# EAGLE board lasersupply8bit (EAGLE 5.11)
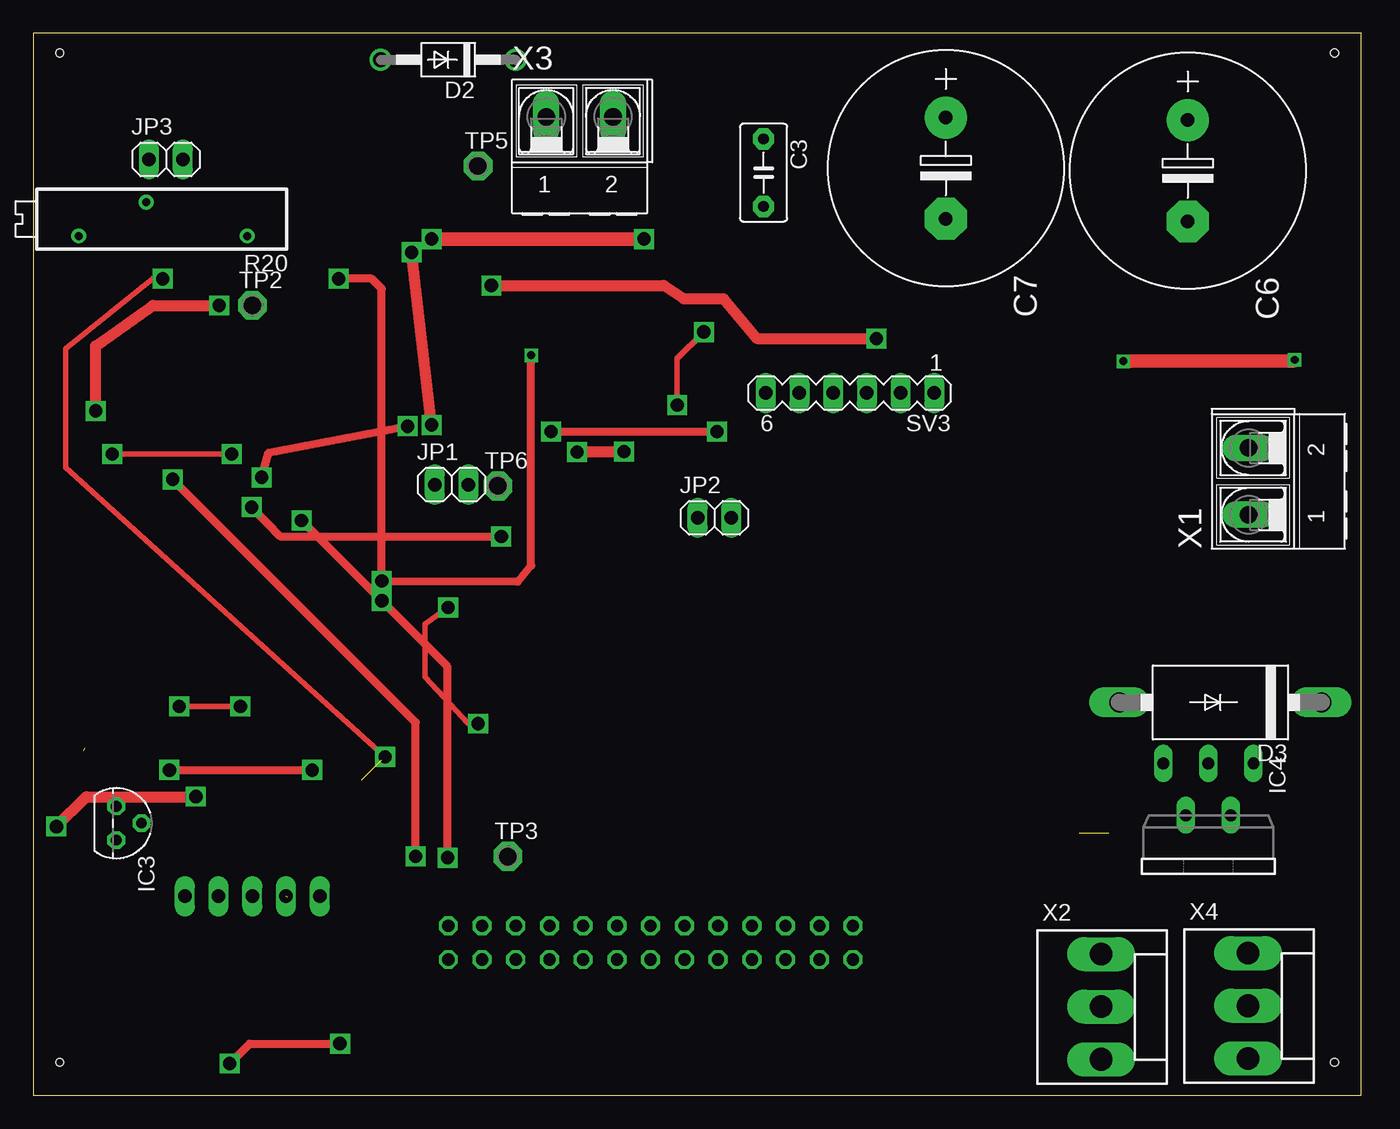
[diagram p0: board, top side]
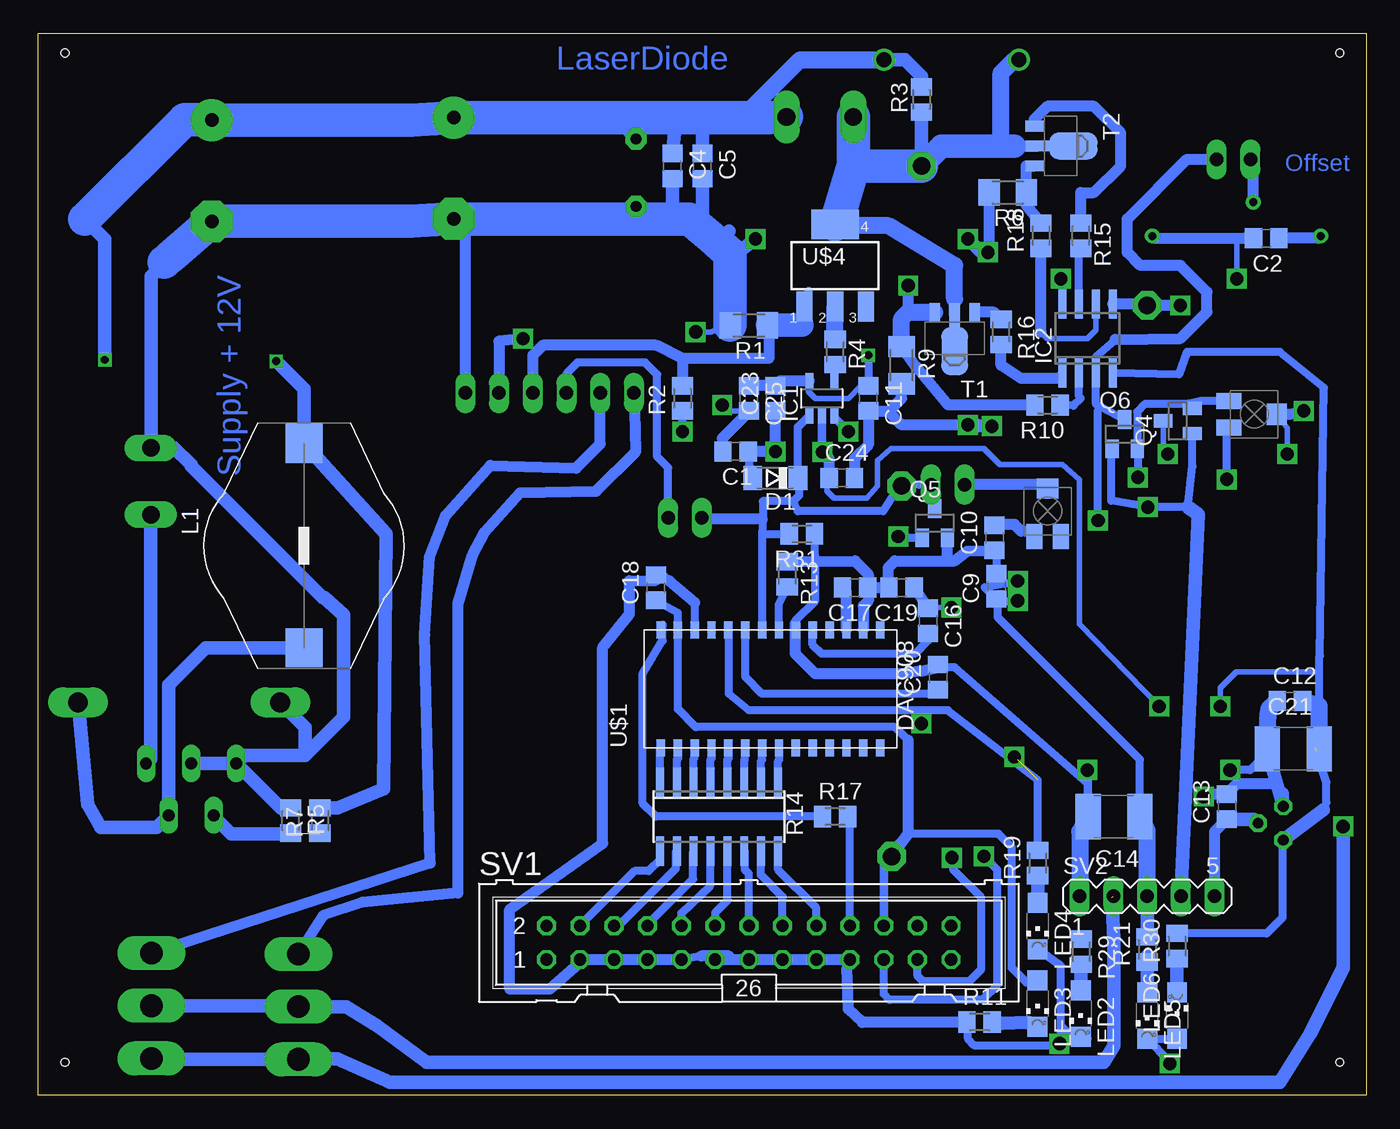
[diagram p1: board, bottom side, seen from below]

Size 100 x 80 mm. Coordinates in mm from the lower left corner, seen from the top.
Outline: 0,0 100,0 100,80 0,80 0,0
Copper layers (1*16): Top 0.035mm / dielectric 1.5mm / Bottom 0.035mm
Design rules "default": minimum track width 10mil, minimum drill 24mil, track to track 8mil, track to pad 8mil, pad to pad 8mil, via to via 8mil, smd to smd 8mil, copper to edge 40mil, drill to drill 8mil, minimum pad ring 10mil, minimum via ring 8mil, stop-mask expansion 4mil, vias tented up to drill 0mil, thermal gap 10mil
Holes 0.6 mm at 98,2.5 98,78.5 2,78.5 2,2.5

## Footprints (pad centres in the part's own frame; a part is rotated, then mirrored left to right if it is on the bottom)
C0805 = smd 1.3 x 1.5: 1 -0.95,0; 2 0.95,0
C5B3.5 = drill 0.813 pad 1.6 octagon: 1 -2.54,0; 2 2.54,0
E7,5-18 = drill 1.016 pad 3.15 round: + -3.81,0 | drill 1.016 pad 3.15 octagon: - 3.81,0
C1812 = smd 1.9 x 3.4: 1 -1.95,0; 2 1.95,0
SOD80C = smd 1.4 x 1.8: A 1.7,0; C -1.7,0
DO41-10 = drill 1.118 round: A 5.08,0; C -5.08,0
DO201-15 = drill 1.499 long: A 7.62,0; C -7.62,0
SOT23-5 = smd 0.6 x 1.2: 1 -0.95,-1.306; 2 0,-1.306; 3 0.95,-1.306; 4 0.95,1.306; 5 -0.95,1.306
SO08 = smd 0.6 x 2.2: 1 -1.905,-2.6; 2 -0.635,-2.6; 3 0.635,-2.6; 4 1.905,-2.6; 5 1.905,2.6; 6 0.635,2.6; 7 -0.635,2.6; 8 -1.905,2.6
TO92 = drill 0.813 octagon: 1 -1.27,0; 2 0,1.905; 3 1.27,0
TO220-51 = drill 0.9 long: 1 -3.4,-8.4; 2 -1.7,-4.5; 3 0,-8.4; 4 1.7,-4.5; 5 3.4,-8.4
1X02 = drill 1.016 long: 1 -1.27,0; 2 1.27,0
X = smd 2.92 x 2.79: 1 -7.685,0; 2 7.685,0
CHIPLED_1206 = smd 1.5 x 1.5: A 0,-1.75; C 0,1.75
SOT23 = smd 1 x 1.4: 1 -0.95,-1.1; 2 0.95,-1.1; 3 0,1.1
M1206 = smd 1.6 x 2: 1 -1.4,0; 2 1.4,0
M0805 = smd 1.3 x 1.6: 1 -0.95,0; 2 0.95,0
SO16 = smd 0.6 x 2.2: 1 -4.445,-2.6; 2 -3.175,-2.6; 3 -1.905,-2.6; 4 -0.635,-2.6; 5 0.635,-2.6; 6 1.905,-2.6; 7 3.175,-2.6; 8 4.445,-2.6; 9 4.445,2.6; 10 3.175,2.6; 11 1.905,2.6; 12 0.635,2.6; 13 -0.635,2.6; 14 -1.905,2.6; 15 -3.175,2.6; 16 -4.445,2.6
RTRIM3006P = drill 0.61 round: 1 -7.62,1.27; 2 0,-1.27; 3 5.08,1.27
ML26 = drill 0.914 octagon: 1 -15.24,-1.27; 2 -15.24,1.27; 3 -12.7,-1.27; 4 -12.7,1.27; 5 -10.16,-1.27; 6 -10.16,1.27; 7 -7.62,-1.27; 8 -7.62,1.27; 9 -5.08,-1.27; 10 -5.08,1.27; 11 -2.54,-1.27; 12 -2.54,1.27; 13 0,-1.27; 14 0,1.27; 15 2.54,-1.27; 16 2.54,1.27; 17 5.08,-1.27; 18 5.08,1.27; 19 7.62,-1.27; 20 7.62,1.27; 21 10.16,-1.27; 22 10.16,1.27; 23 12.7,-1.27; 24 12.7,1.27; 25 15.24,-1.27; 26 15.24,1.27
MA05-1 = drill 1.016 long: 1 -5.08,0; 2 -2.54,0; 3 0,0; 4 2.54,0; 5 5.08,0
MA06-1 = drill 1.016 long: 1 -6.35,0; 2 -3.81,0; 3 -1.27,0; 4 1.27,0; 5 3.81,0; 6 6.35,0
SOT89-BCE = smd 0.8 x 1.4: B -1.499,-1.981; E 1.499,-1.981 | smd 0.8 x 1.9: C 0,-1.727 | smd 2.032 x 3.65: C@1 0,0.94
P1-13 = drill 1.321 pad 2.159 octagon: TP 0,0
TSSOP-28 = smd 1.27 x 0.635: PIN1 -5.08,7.62; PIN2 -5.08,6.35; PIN3 -5.08,5.08; PIN4 -5.08,3.81; PIN5 -5.08,2.54; PIN6 -5.08,1.27; PIN7 -5.08,0; PIN8 -5.08,-1.27; PIN9 -5.08,-2.54; PIN10 -5.08,-3.81; PIN11 -5.08,-5.08; PIN12 -5.08,-6.35; PIN13 -5.08,-7.62; PIN14 -5.08,-8.89; PIN15 3.81,-8.89; PIN16 3.81,-7.62; PIN17 3.81,-6.35; PIN18 3.81,-5.08; PIN19 3.81,-3.81; PIN20 3.81,-2.54; PIN21 3.81,-1.27; PIN22 3.81,0; PIN23 3.81,1.27; PIN24 3.81,2.54; PIN25 3.81,3.81; PIN26 3.81,5.08; PIN27 3.81,6.35; PIN28 3.81,7.62
TRIMMER_SMD = smd 1.2 x 1.9: A 1,-1.9; E -1,-1.9 | smd 1.6 x 1.5: S 0,1.7
SOT223 = smd 1.219 x 2.235: 1 -2.311,-3.099; 2 0,-3.099; 3 2.311,-3.099 | smd 3.6 x 2.2: 4 0,3.099
AK500/2-H = drill 1.321 long: 1 -2.515,0; 2 2.515,0
KK-156-3 = drill 1.7 pad 2.184 long: 1 -3.96,0; 2 0,0; 3 3.96,0

## Placement (x,y rotation side)
C1  100n  [C0805]  47.5,48.5 180 bottom
C2  [C0805]  7.54,64.55 180 bottom
C3  [C5B3.5]  55,69.5 270 top
C4  [C0805]  52.25,70 270 bottom
C5  [C0805]  50,70 270 bottom
C6  10m  [E7,5-18]  86.95,69.64 270 top
C7  10m  [E7,5-18]  68.73,69.83 270 top
C9  100n  [C0805]  27.86,38.34 90 bottom
C10  10n  [C0805]  28,42 90 bottom
C11  100n  [C0805]  37.5,52.5 270 bottom
C12  100n  [C0805]  5.75,29.7 0 bottom
C13  1u  [C0805]  10.5,21.75 90 bottom
C14  1u  [C1812]  19,21 180 bottom
C16  [C0805]  33,35.75 270 bottom
C17  [C0805]  38.5,38.25 180 bottom
C18  [C0805]  53.5,38.25 90 bottom
C19  [C0805]  35,38.25 180 bottom
C20  [C0805]  32.25,31.5 90 bottom
C21  1u  [C1812]  5.5,26.1 0 bottom
C23  10n  [C0805]  44.5,52.5 90 bottom
C24  6u8  [C0805]  39.5,46.5 0 bottom
C25  6u8  [C0805]  46.5,52.5 270 bottom
D1  6V  [SOD80C]  44.5,46.5 180 bottom
D2  1N4004  [DO41-10]  31.25,78 180 top
D3  1N5400  [DO201-15]  89.4,29.6 180 top
IC1  LMH6703MF  [SOT23-5]  41,52.5 0 bottom
IC2  TL72D  [SO08]  21,57 0 bottom
IC3  [TO92]  6.25,20.5 270 top
IC4  [TO220-51]  88.5,16.6 180 top
JP1  [1X02]  31.5,46 0 top
JP2  [1X02]  51.3,43.5 0 top
JP3  [1X02]  10,70.5 0 top
L1  [X]  80,41.4 270 bottom
LED2  [CHIPLED_1206]  21.51,6.18 180 bottom
LED3  [CHIPLED_1206]  24.76,6.91 180 bottom
LED4  [CHIPLED_1206]  24.75,12.75 180 bottom
LED5  [CHIPLED_1206]  16.5,6 180 bottom
LED6  [CHIPLED_1206]  14.25,6 0 bottom
Q4  BSS123  [SOT23]  14.2,50.8 90 bottom
Q5  BSS123  [SOT23]  32.5,43.1 0 bottom
Q6  BSS123  [SOT23]  18.2,49.8 0 bottom
R1  2.1  [M1206]  46.5,58 180 bottom
R2  10k  [M0805]  51.5,52.5 90 bottom
R3  1M  [M0805]  33.5,75 90 bottom
R4  68  [M0805]  40,56 270 bottom
R5  1k  [M0805]  81,20.7 270 bottom
R6  17  [M1206]  27,68 180 bottom
R7  3878  [M0805]  78.8,20.7 90 bottom
R9  17  [M1206]  35,55 270 bottom
R10  10k  [M0805]  24,52 180 bottom
R11  470  [M0805]  29.12,5.53 0 bottom
R13  25  [M0805]  43.6,39.25 270 bottom
R14  [SO16]  48.75,21 180 bottom
R15  68  [M0805]  21.5,64.75 270 bottom
R16  200  [M0805]  27.5,57.5 270 bottom
R17  [M0805]  40,21 0 bottom
R18  10k  [M0805]  24.5,64.75 90 bottom
R19  300  [M0805]  24.75,17.5 90 bottom
R20  1M  [RTRIM3006P]  8.5,66 180 top
R21  470  [M0805]  16.5,11 90 bottom
R29  300  [M0805]  21.45,10.82 270 bottom
R30  470  [M0805]  14.25,11.25 90 bottom
R31  50  [M0805]  42.5,42.3 180 bottom
SV1  [ML26]  46.5,11.5 0 bottom
SV2  Supply  [MA05-1]  16.5,15 0 bottom
SV3  [MA06-1]  61.5,52.9 180 top
T1  [SOT89-BCE]  31,57 180 bottom
T2  [SOT89-BCE]  23,71.5 270 bottom
TP2  TPPAD1-13  [P1-13]  16.5,59.5 0 top
TP3  TPPAD1-13  [P1-13]  35.75,18 0 top
TP5  TPPAD1-13  [P1-13]  33.5,70 0 top
TP6  TPSPAD1-13  [P1-13]  35,45.9 0 top
U$1  DAC908  [TSSOP-28]  45.5,31.25 90 bottom
U$2  5K  [TRIMMER_SMD]  8.45,51.3 270 bottom
U$3  100  [TRIMMER_SMD]  24,44 0 bottom
U$4  BLT81  [SOT223]  40,62.5 0 bottom
X1  Mainsupply  [AK500/2-H]  91.54,46.25 90 top
X2  FAN  [KK-156-3]  80.43,6.68 270 top
X3  [AK500/2-H]  41.15,73.7 0 top
X4  FAN2  [KK-156-3]  91.5,6.75 270 top

## Library data of the parts
C1 C2 C4-C7 C9-C14 C16-C21 C23-C25 R2 R5 R7 R10 R11 R16-R21 R29-R31 = rcl
C3 = capacitor-wima
D1-D3 = diode
IC1-IC4 = linear
JP1-JP3 = pinhead
L1 = wuerth-elektronik
LED2-LED6 = led
Q4-Q6 = transistor-small-signal
R1 R3 R4 R6 R9 R13 R15 = resistor
R14 = resistor-bourns
SV1 = con-harting-ml; OC_FARNELL: unknown; OC_NEWARK: unknown
SV2 SV3 = con-lstb
T1 T2 = transistor-neu-to92
TP2 TP3 TP5 TP6 = testpad
U$1-U$3 = siro
U$4 = zetex
X1 X3 = con-ptr500
X2 X4 = con-molex

## Nets
+5V: C2.2 C16.1 C19.1 R19.2 R20.1 U$1.PIN24
+12V: SV2.2 X2.2 X4.2
-12V: C13.1 IC3.2 SV2.5
B$1: R14.8 U$1.PIN1
DGND: C18.2 LED2.C LED4.C LED5.C LED6.A R11.1 SV1.3 SV1.5 SV1.7 SV1.9 SV1.11 SV1.13 SV1.15 SV1.17 SV1.19 U$1.PIN26
GND: C1.2 C3.2 C4.2 C5.2 C6.- C7.- C11.2 C24.2 C25.2 D3.A IC4.3 IC4.5 Q4.2 Q6.2 R1.2 R5.1 R6.2 R9.2 SV3.1 U$2.E X1.2
GNDA: C9.2 C10.1 C12.1 C13.2 C14.2 C17.1 C19.2 C20.2 C21.1 IC3.1 Q5.2 R13.1 R31.1 SV2.1 U$1.PIN16 U$1.PIN20 X2.3 X4.3
N$1: R1.1 R2.2 SV3.3 U$4.1
N$2: JP2.2 SV3.4
N$3: IC1.3 R2.1
N$4: IC1.4 R4.2
N$5: R4.1 U$4.2
N$7: IC2.2 R10.1
N$8: JP3.1 R20.2
N$9: IC4.4 R5.2 R7.1
N$10: D1.C IC1.1 JP1.2 JP2.1 Q5.3 R31.2 TP6.TP U$1.PIN22
N$11: IC2.1 R16.2
N$12: R16.1 T1.B
N$13: R9.1 R10.2 SV3.2 T1.E
N$14: IC2.3 JP3.2 Q6.3 SV1.23
N$15: R6.1 R18.2 T2.E
N$16: IC2.7 R15.2
N$17: D3.C IC4.2 L1.2
N$18: R15.1 T2.B
N$20: D2.A R3.1 T1.C T2.C TP5.TP U$4.4 X3.1
N$21: IC2.5 Q4.3 TP2.TP U$2.S
N$22: IC2.6 R18.1
N$24: SV1.21 U$2.A
N$25: R14.7 U$1.PIN2
N$27: C2.1 R20.3
N$29: R14.6 U$1.PIN3
N$30: SV3.6 X2.1
N$32: R14.5 U$1.PIN4
N$33: LED3.C R11.2
N$34: C3.1 C4.1 C5.1 C6.+ C7.+ D2.C L1.1 R3.2 R7.2 X3.2
N$35: R14.4 U$1.PIN5
N$36: R14.3 U$1.PIN6
N$37: R14.2 U$1.PIN7
N$38: R14.1 U$1.PIN8
N$39: R17.1 U$1.PIN28
N$40: C16.2 U$1.PIN19
N$41: R14.9 SV1.4
N$42: LED2.A R29.2
N$43: C17.2 U$1.PIN17
N$44: SV3.5 X4.1
N$47: R13.2 U$1.PIN21
N$48: C20.1 U$1.PIN23
N$49: R14.10 SV1.6
N$52: R14.11 SV1.8
N$53: R14.12 SV1.10
N$54: R14.13 SV1.12
N$56: R14.14 SV1.14
N$57: R14.15 SV1.16
N$59: R14.16 SV1.18
N$61: R17.2 SV1.20
N$62: JP1.1 U$3.S
N$63: C10.2 U$3.E
N$64: LED4.A R19.1
N$66: LED5.A R21.1
N$67: LED6.C R30.1
N$68: Q4.1 Q5.1 Q6.1 SV2.4
N$70: C18.1 LED3.A SV1.22 TP3.TP U$1.PIN27
N$72: IC4.1 X1.1
V+: C9.1 C11.1 C14.1 C23.2 C25.1 IC1.5 IC2.8 R21.2 SV2.3
V-: C1.1 C12.2 C21.2 C23.1 C24.1 D1.A IC1.2 IC2.4 IC3.3 R30.2
VCC: R29.1

## Tracks (layer width: path | path; a pad name or v marks a point on that pad's centre or on a via)
+5V  (via drill 1 pad 0.61)  (1 unrouted)
  Top 0.406: v33.5,28 32.75,28 29.5,31.5 29.5,35.5 v31.25,36.75 | v9.75,61.5 9,61.5 2.45,56.25 2.45,47.3 v26.5,25.5
  Bottom 0.406: 33.5,29 v33.5,28 | v31.25,36.75 32.95,36.75 | R20.1 10.23,64.73 9.75,64.25 v9.75,61.5 | v26.5,25.5 26.5,25.25 26.22,25.28
  Bottom 0.61: 34,38.2 C19.1 | 32.95,36.75 C16.1 | R19.2 24.75,23.75 31.5,29 33.5,29 46.5,29 48,30.25 48,35.02 U$1.PIN24
  Bottom 0.813: C16.1 34,38.2 | C2.2 15.94,64.55 R20.1
+12V  (1 unrouted)
  Bottom 1.016: 19.17,14.92 19,11.75 19,3.75 19.75,2.5 70.75,2.5 74.49,5.26 76.81,6.68 X2.2 | 80.5,6.75 X4.2
  Bottom 1.27: X2.2 80.5,6.75
-12V
  Bottom 0.813: SV2.5 11.42,19.88 C13.1
  Bottom 1.016: C13.1 8.46,20.8 IC3.2
B$1
  Bottom 0.61: R14.8 53.2,26.09 U$1.PIN1
DGND  (via drill 1 pad 0.61)
  Top 0.61: v23.1,3.9 16.3,3.9 v14.8,2.4
  Bottom 0.61: 39.11,9.61 SV1.19 | SV1.11 48,10.5 | 50.08,10.5 SV1.9 | 50.58,37.12 U$1.PIN26 | 52.5,38.75 52.95,39.2 C18.2 53.5,38.8 | LED2.C 22.18,4.43 23,5.25 | 23,5.25 23,9.75 LED4.C | 23,4 23,5.25 | 23,4 v23.1,3.9 23.25,3.75 29.5,3.75 30,4.25 30,5.45 R11.1 | 21.19,4.25 22.75,4.25 23,4 | v14.8,2.4 14.8,2.55 LED5.C LED6.A
  Bottom 0.813: 39.11,9.61 39,6.5 37.95,5.5 R11.1 | SV1.19 SV1.17 SV1.15 SV1.13 SV1.11 | 48,10.5 50.08,10.5 | SV1.9 SV1.7 SV1.5 59,10.23 | 52.5,38.75 50.58,37.12 | 53.5,38.8 55.5,38.75 55.5,36.25 57.5,33.75 57.5,19 64.5,14 64.5,8 61.5,8 59,10.23 | 59,10.23 SV1.3
  Bottom 1.016: 21.19,4.25 LED2.C
GND  (via drill 1, 1 pad 0.61)
  Top 0.406: v48.5,52 48.5,55.5 v50.5,57.5
  Top 0.61: v28.2,50.4 17.75,48.4 v17.2,46.55
  Top 0.813: v30,50.5 v28.5,63.5
  Top 1.016: v30,64.5 v46,64.5
  Bottom 0.406: 56.5,66 C3.2 | C25.2 48.05,51.55 v48.5,52 | v50.5,57.5 49.4,57.5 R1.2 | 57.75,66 57.75,65.17
  Bottom 0.61: 13.1,52.15 Q4.2 | 13.1,52.15 12.45,52.3 U$2.E | 13.1,52.15 13.7,52.05 16.7,52.05 17.25,51.5 Q6.2 17.2,48.65 v17.2,46.55 | 48.5,49.5 48.5,48.5
  Bottom 0.813: SV3.1 67.85,65.14 C7.- | C25.2 46.5,51.5 48.5,49.5 48.5,48.55 C1.2 | C24.2 38.55,47.95 37.5,49 C11.2 37.45,51.5 36,51.5 | R9.2 35,52.5 36,51.5 | R6.2 28.4,63.6 v28.5,63.5 | v30,50.5 35,50.5 36,51.5
  Bottom 1.016: 52.25,66 C4.2 | C5.2 50,65.92 50.41,65.51 50.47,65.51 50.75,65.79 | R1.2 47.9,62.9 48,63 v46,64.5 | v30,64.5 29,63.5 v28.5,63.5 | v30,50.5 28.35,50.4 v28.2,50.4 | 48.87,64.21 48,65.07 | R5.1 81.75,21.65 IC4.5 | IC4.5 IC4.3 | 91.61,48.7 X1.2 91.5,48.8 | 91.5,48.8 89.8,48.8 88.5,47.5 88.5,47.4 78.6,37.5 78.5,37.5 77,36.2 77,28.5 79.9,25.6 | 91.5,48.8 91.5,61.71 90.07,63.15 | 79.9,25.6 84.5,25.6 IC4.5 | 79.9,25.6 79.9,27.72 D3.A
  Bottom 2.54: 90.54,62.74 90.07,63.15 C6.- 71.92,65.83 C7.- 68.25,66 57.75,66 56.5,66 52.25,66 51,66 50.75,65.79 48.87,64.21 47.9,63.4 R1.2
GNDA  (via drill 1, 1 pad 0.61)
  Top 0.61: v10.25,24.5 v21,24.5
  Top 0.813: v12.25,22.5 4,22.5 v1.75,20.25
  Bottom 0.61: 41.5,40.2 41.5,37.25 42.96,35.79 U$1.PIN20 43,35.52 | 41.5,40.2 R13.1 | 37.5,38.3 C17.1 37.5,38.2 | 32.45,32.2 C20.2 | C19.2 36,38.3 | 31.5,40.25 31.55,40.3 | 41.5,40.2 R31.1 | 33.5,31.95 32.45,32.25 31,32.25 20.95,23.45 C14.2 20.95,24.45 v21,24.5 | v10.25,24.5 8.75,24.5 7.6,25.65 | C9.2 27.86,40.91 C10.1
  Bottom 0.813: R13.1 38.5,40.25 37.5,39.25 37.5,38.3 | U$1.PIN16 37.88,36.87 37.5,37.25 37.5,38.2 | C17.1 C19.2 | 32.45,32.2 33.5,31.95 35,31.75 41.5,31.75 43,33.25 43,35.52 | C10.1 30.05,41 31,40.25 31.5,40.25 35.5,40.25 36,39.75 36,38.3 | 31.55,40.3 Q5.2 | IC3.1 6.25,22.75 7,23.5 9.7,23.5 C13.2 12.05,22.7 v12.25,22.5
  Bottom 1.016: IC3.1 7.27,25.32 7.6,25.65 C21.1 | 80.4,2.75 77.5,2.75 73.5,1 6.5,1 4.25,4.6 1.75,9.6 v1.75,20.25 | X2.3 91.43,2.72
  Bottom 1.27: C12.1 7.3,29.2 7.4,28.5 7.4,26.05 C21.1 | SV2.1 21.58,19.87 C14.2 | 80.4,2.75 X2.3 | 91.43,2.72 X4.3
N$1
  Bottom 0.61: 42,60.59 U$4.1 42.5,59.21 42.5,58 | R1.1 45,58.1
  Bottom 0.813: 51.5,55.5 R2.2 | U$4.1 42.41,59.5 | SV3.3 62.77,55.73 62,56.5 53.5,56.5 51.5,55.5 | 51.5,55.5 45,55.5 45,58.1
  Bottom 1.778: 42.5,58 R1.1
N$2
  Bottom 0.61: JP2.2 52.57,47.27 53.4,48.1 53.4,54.3 54.3,55.2 59.4,55.2 60.2,54.4 60.2,52.93 SV3.4
N$3  (via drill 1)
  Top 0.61: v39,50 v51.5,50
  Bottom 0.61: IC1.3 40.05,51.05 v39,50 | v51.5,50 R2.1
N$4
  Bottom 0.61: IC1.4 40.05,55 R4.2
N$5
  Bottom 1.27: R4.1 U$4.2
N$7
  Bottom 0.61: R10.1 22.05,51.95 21.5,52.5 21.64,52.63 IC2.2
N$8
  Bottom 0.813: R20.2 8.5,70.27 JP3.1
N$9  (1 unrouted)
  Bottom 1.016: IC4.4 86.8,21 85.5,19.7 81.5,19.7 | 81.5,19.7 81.05,19.7 R5.2 | 81.5,19.7 81.45,19.75
N$10
  Bottom 0.406: 45.46,44.75 45.46,43.44 45.5,43.4
  Bottom 0.61: Q5.3 32.5,45.83 JP1.2 33.67,46 TP6.TP 35.4,45.6 36.4,44 42.8,44 43.15,44.75 | IC1.1 42.8,50.34 D1.C 42.7,46.4 42.7,45.2 43.15,44.75 | 45.5,42.3 45.45,43.45 45.45,44.74 45.46,44.75 43.15,44.75 | 45.5,42.3 U$1.PIN22 | 45.5,42.3 R31.2
  Bottom 0.813: 45.5,43.4 49.93,43.4 JP2.1
N$11
  Bottom 0.61: IC2.1 23.3,54
  Bottom 0.813: R16.2 27.5,55 26,54 23.3,54
N$12
  Bottom 0.813: T1.B 28.03,58.98 R16.1
N$13  (via drill 1)
  Top 0.813: v63.5,57 54.5,57 52,60 49,60 47.5,61 v34.5,61
  Bottom 0.61: 34,58.98 34.5,59.48
  Bottom 0.813: R9.1 33.9,54.9 31.5,52 R10.2 | SV3.2 65.31,56.81 v63.5,57 | 34.5,59.48 v34.5,61
  Bottom 1.27: T1.E 34,58.98 34.52,58.98 35,58.5 R9.1
N$14  (via drill 1 pad 0.61)
  Top 0.61: v31.2,17.9 31.2,32.3 v20.2,43.3
  Bottom 0.61: 18.9,56.94 20.36,55.63 IC2.3 20.36,52.06 19.96,51.85 | 19.96,51.85 Q6.3 | SV1.23 33.8,9 33.4,8.6 29.9,8.6 29,9.5 29,14.9 31.1,17 31.1,17.8 v31.2,17.9 | v20.2,43.3 20.2,51.61 19.96,51.85
  Bottom 0.813: 18.9,56.94 14,57 12,59 12,60.5 14,62.5 17,62.5 18,63.5 18,66 13.5,70.5 JP3.2
N$15
  Bottom 0.813: T2.E 25.6,70 R6.1 25.6,67.05 R18.2
N$16
  Bottom 0.61: IC2.7 21.64,63.41 R15.2
N$17
  Bottom 1.016: D3.C 96.3,21.9 95.3,20.2 91.1,20.2 IC4.2 90.2,30.9 87.4,33.7 80.02,33.7 L1.2
N$18
  Bottom 0.813: R15.1 21.5,68 20.5,68 18.5,70 18.5,72.5 20.5,74.5 24.02,74.5 25,73.52 T2.B
N$20
  Bottom 0.813: T1.C 31,60 | 26.5,71.5 T2.C
  Bottom 1.016: TP5.TP R3.1 | TP5.TP 33.5,69.75 33.75,69.5 33.75,69.75 TP5.TP
  Bottom 1.27: 31,60 31,62.5 36,65.5 39.9,65.5 U$4.4 | D2.A 26.5,78 27.5,77 27.5,71.5
  Bottom 1.778: 26.5,71.5 27.5,71.5 32,71.5 TP5.TP
  Bottom 2.54: 38.63,70 39.88,65.71 U$4.4 | 38.63,70 X3.1 | 38.63,70 TP5.TP
N$21  (via drill 1, 1 pad 0.61)
  Top 0.406: v5.95,48.3 v14.95,48.3
  Top 0.813: v14,59.5 9,59.5 4.7,56.45 v4.7,51.55
  Bottom 0.406: Q4.3 15.3,48.95 v14.95,48.3 | v5.95,48.3 5.95,50.25 U$2.S
  Bottom 0.61: TP2.TP 16.6,59.6
  Bottom 0.813: 16.6,59.6 IC2.5 | v14,59.5 TP2.TP | v4.7,51.55 5.75,51.3 U$2.S
N$22
  Bottom 0.406: IC2.6 20.36,57.63 21,57 24,57 24.5,57.5
  Bottom 0.813: 24.5,57.5 R18.1
N$24  (via drill 1 pad 0.61)
  Top 0.61: v28.8,18 28.8,28.1 v10.5,46.4
  Bottom 0.61: SV1.21 36.34,7.64 35.9,7.2 28.9,7.2 27.8,8.3 27.8,17 v28.8,18 | v10.5,46.4 10.5,50.15 U$2.A
N$25
  Bottom 0.61: R14.7 51.92,25.27 51.8,25.4 51.8,26.12 U$1.PIN2
N$27
  Bottom 0.813: C2.1 3.6,64.55 R20.3
N$29
  Bottom 0.61: R14.6 50.66,25.34 50.6,25.4 50.6,26.15 U$1.PIN3
N$30
  Bottom 0.813: SV3.6 55.1,53.05 55,48.5 58,45.5 63.7,45.4 66.4,42.4 67.3,40.7 68.4,37 68.4,15.25 75.6,14.55 78.54,13.55 X2.1
N$32
  Bottom 0.61: R14.5 49.38,25.32 49.3,25.4 U$1.PIN4
N$33
  Bottom 1.016: R11.2 27.43,5.42 25.5,5.5 24.85,5 LED3.C
N$34  (via drill 0.6)
  Top 1.016: v82.1,55.3 94.9,55.3 v95,55.4
  Bottom 1.016: 56.5,73.64 C3.1 | 52,73.64 C4.1 | 50,73.64 C5.1 | 47,73.64 47.92,73.64 | R3.2 33.5,76.75 34.75,78 D2.C | R7.2 77.45,21.65 74,23.1 73.8,42.28 L1.1 80,53.2 v82.1,55.3 | v95,55.4 95,64.5 96.5,66
  Bottom 1.27: D2.C 42.64,78 47,73.64
  Bottom 2.54: X3.2 44.98,73.64 47,73.64 50,73.64 52,73.64 56.5,73.64 C7.+ 71.92,73.45 C6.+ 87,73.5 89,73.5 96.5,66
N$35
  Bottom 0.61: R14.4 48.12,25.29 48,25.4 48,26.13 U$1.PIN5
N$36
  Bottom 0.61: R14.3 46.84,25.25 46.8,25.3 46.8,26.14 U$1.PIN6
N$37
  Bottom 0.61: R14.2 45.58,25.23 45.5,25.3 U$1.PIN7
N$38
  Bottom 0.61: R14.1 44.3,25.2 44.2,25.3 44.2,26.14 U$1.PIN8
N$39
  Bottom 0.61: R17.1 53.5,21 54.5,22 54.5,31.75 53,34.25 53,35.44 U$1.PIN28
N$40
  Bottom 0.61: U$1.PIN19 41.69,33.94 41,33.25 34,33.25 33,34.25 33.05,34.25 C16.2
N$41
  Bottom 0.61: R14.9 53.2,17.75 54.05,16.9 55.1,16.9 59.2,12.8 SV1.4
N$42
  Bottom 1.016: LED2.A 21.51,9.31 R29.2
N$43
  Bottom 0.61: 39.15,37.95 C17.2
  Bottom 0.813: U$1.PIN17 39.15,37.95
N$44
  Bottom 0.813: SV3.5 57.69,49.06 59.5,47.25 65.95,47.45 69.35,43.65 70.55,40.55 70.9,34.7 70.5,17.51 X4.1
N$47
  Bottom 0.61: U$1.PIN21 44.23,36.97 R13.2
N$48
  Bottom 0.61: U$1.PIN23 46.77,31.52 45.5,30.25 32.55,30.25 C20.1
N$49
  Bottom 0.61: SV1.6 56.33,12.77 52,17.1 52,18.32 R14.10
N$52
  Bottom 0.61: SV1.8 54.12,12.88 50.7,16.3 50.7,18.36 R14.11
N$53
  Bottom 0.61: SV1.10 51.58,13.72 49.4,15.8 49.4,18.39 R14.12
N$54
  Bottom 0.61: SV1.12 49.04,13.76 48.1,14.7 48.1,18.39 R14.13
N$56
  Bottom 0.61: SV1.14 46.5,16.7 46.8,17 46.8,18.36 R14.14
N$57
  Bottom 0.61: SV1.16 43.96,14.96 45.6,16.6 45.6,18.38 R14.15
N$59
  Bottom 0.61: SV1.18 41.42,14.12 44.3,17 R14.16
N$61
  Bottom 0.61: SV1.20 38.88,20.83 R17.2
N$62
  Bottom 0.61: U$3.S 24.5,46
  Bottom 0.813: 24.5,46 JP1.1
N$63
  Bottom 0.61: U$3.E 25.1,42.4 | 27.95,43 C10.2
  Bottom 0.813: 25.1,42.4 26,42.5 26.5,43 27.95,43
N$64
  Bottom 1.016: LED4.A R19.1
N$66
  Bottom 0.813: 16.5,10.5 R21.1
  Bottom 1.016: LED5.A 16.5,10.5
N$67
  Bottom 1.016: LED6.C R30.1
N$68  (via drill 1 pad 0.61)
  Top 0.61: v35.25,42.1 18.6,42.1 v16.45,44.3
  Bottom 0.61: Q4.1 13.1,47.4 13.45,44.3 v16.45,44.3 19.2,44.8 19.2,48.65 Q6.1 | Q5.1 34.35,42 v35.25,42.1
  Bottom 1.016: SV2.4 12.66,43.76 13.45,44.3
N$70
  Bottom 0.406: LED3.A 25.6,8.5
  Bottom 0.61: 53.5,37.25 51.85,36.35 U$1.PIN27 51.85,29.1 50.5,27.75 35.5,27.75 34.5,26.75 | 53.5,37.25 53.5,37.2 | 53.5,37.25 C18.1 | TP3.TP 36.34,17.41 SV1.22 36.34,17.46 35.6,18.2 35.6,18.6 34.5,19.7 27.7,19.7 26.7,18.7 26.7,9.6 25.6,8.5
  Bottom 0.813: TP3.TP 34.5,19.75 34.5,26.75
N$72
  Bottom 1.016: X1.1 91.54,25.36 IC4.1
V+  (via drill 0.6, 1 pad 0.61)
  Top 0.61: v23,61.5 25.5,61.5 26.25,60.75 v26.25,37.25 | v37.5,55.75 37.5,39.9 36.5,38.7 v26.25,38.75
  Bottom 0.406: C11.1 38.05,53.45 39,52.5 41.5,52.5 42,53 42,53.76 IC1.5
  Bottom 0.61: C14.1 17.05,25.3 27.75,36 27.75,37.28 C9.1 | IC2.8 22.91,61.66 v23,61.5 | v26.25,37.25 27.72,37.25 C9.1 | v37.5,55.75 C11.1 | v26.25,38.75 28.75,38.28 C9.1
  Bottom 0.813: C25.1 C23.2 44.14,53.81 IC1.5
  Bottom 1.016: R21.2 SV2.3
  Bottom 1.27: SV2.3 16.5,19.95 C14.1
V-  (via drill 1, 1 pad 0.61)  (1 unrouted)
  Top 0.406: v11,29.3 v15.6,29.3
  Top 0.61: v40.95,48.45 41,48.5
  Top 0.813: 41,48.5 v44.5,48.5
  Bottom 0.406: 40.6,46.5 40.6,45.5 40.1,45 37.6,45 36.8,45.9 36.8,47.8 35.8,48.7 28.8,48.7 27.6,47.5 22.9,47.5 21.6,46.4 21.6,35.5 v15.6,29.3 | v11,29.3 11,30.7 9.8,31.9 3.55,31.9
  Bottom 0.61: IC2.4 14.1,54.3 13.5,56 6.5,56 3.2,53.3 3.5,33.1 3.55,32.95 3.55,31.9 3.55,29.34 | 3.88,26.18 3,23.6 3,22.05 3.25,21.5 | 40.5,47.75 41,48.25 IC1.2 41,48.5 40.9,48.4 40.9,48.3 40.5,47.9 40.5,46.6 40.6,46.5 | D1.A 46.2,47.1 46.5,47.4 46.5,48.45 C1.1 | R30.2 7.5,12.2 6.3,13.4 6.3,19.18 IC3.3
  Bottom 0.813: C23.1 v44.5,48.5 C1.1 | 41,48.5 v40.95,48.45 40.9,48.4 40.45,47.95 C24.1
  Bottom 1.016: IC3.3 3.25,21.5
  Bottom 1.27: 3.75,25.95 C21.2 3.55,29.34 C12.2

## Text on the board
Bottom: LaserDiode | Offset | Supply + 12V